# EAGLE board PCB (EAGLE 9.7.0)
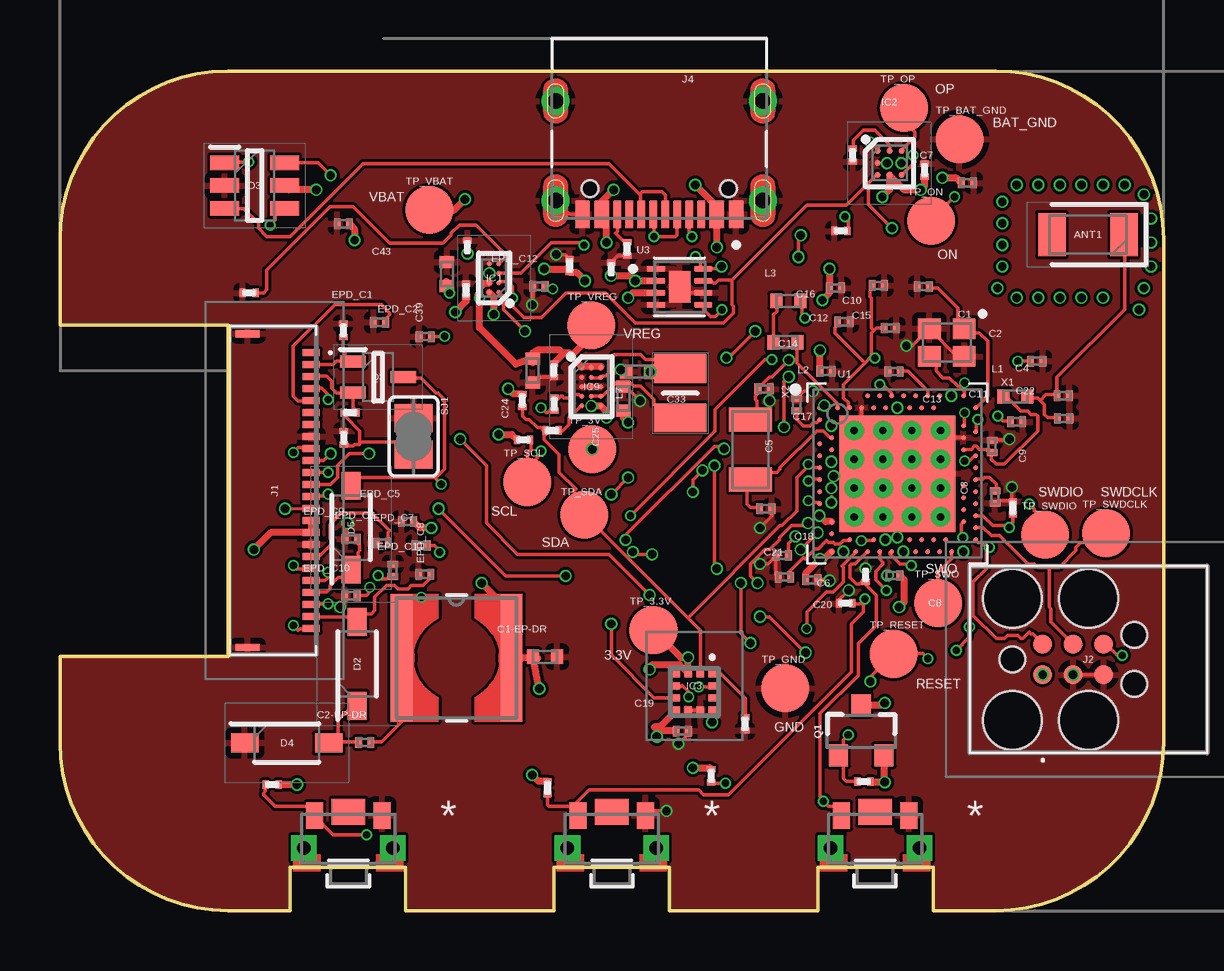
[diagram p0: board, top side]
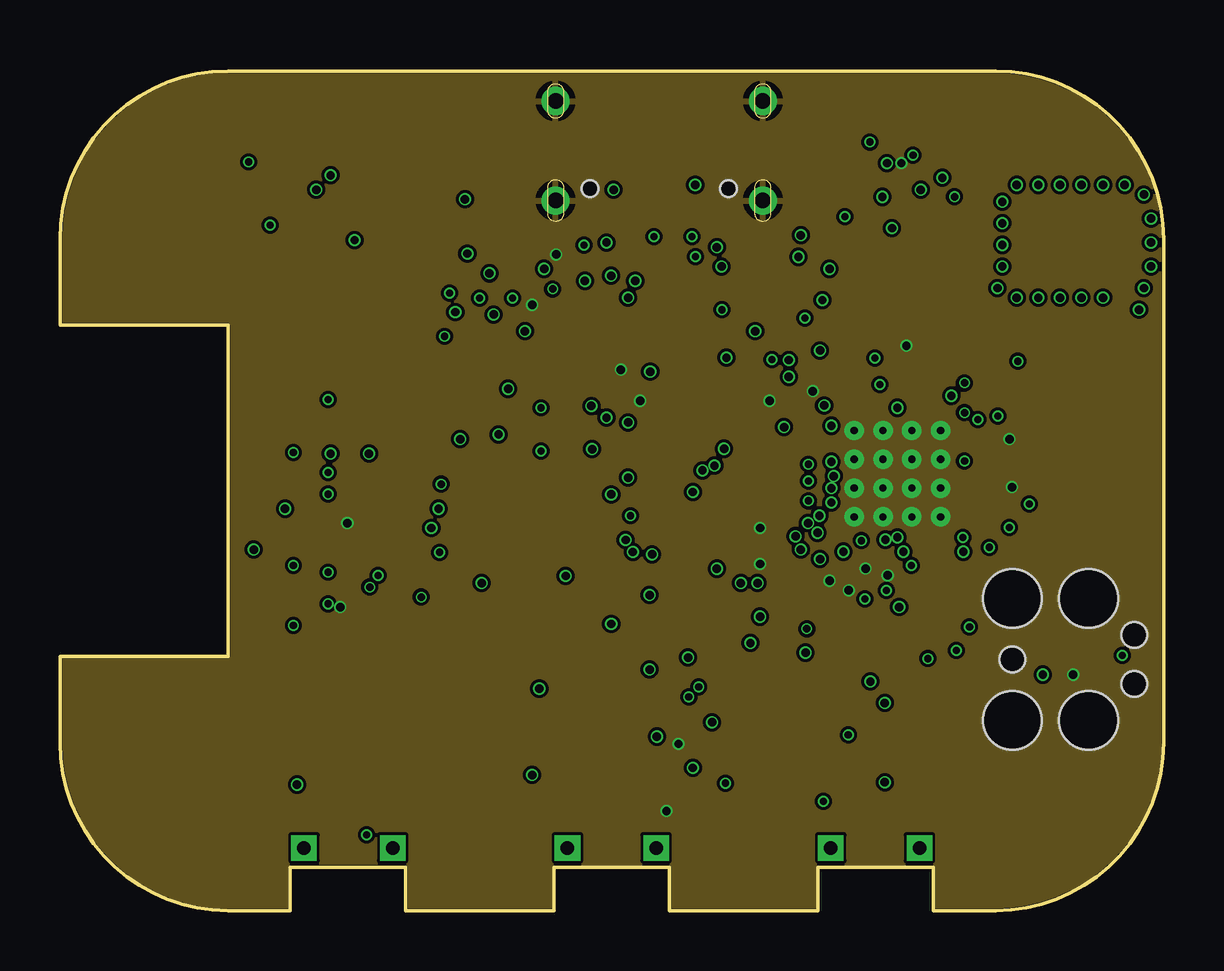
[diagram p1: board, inner layer Route2]
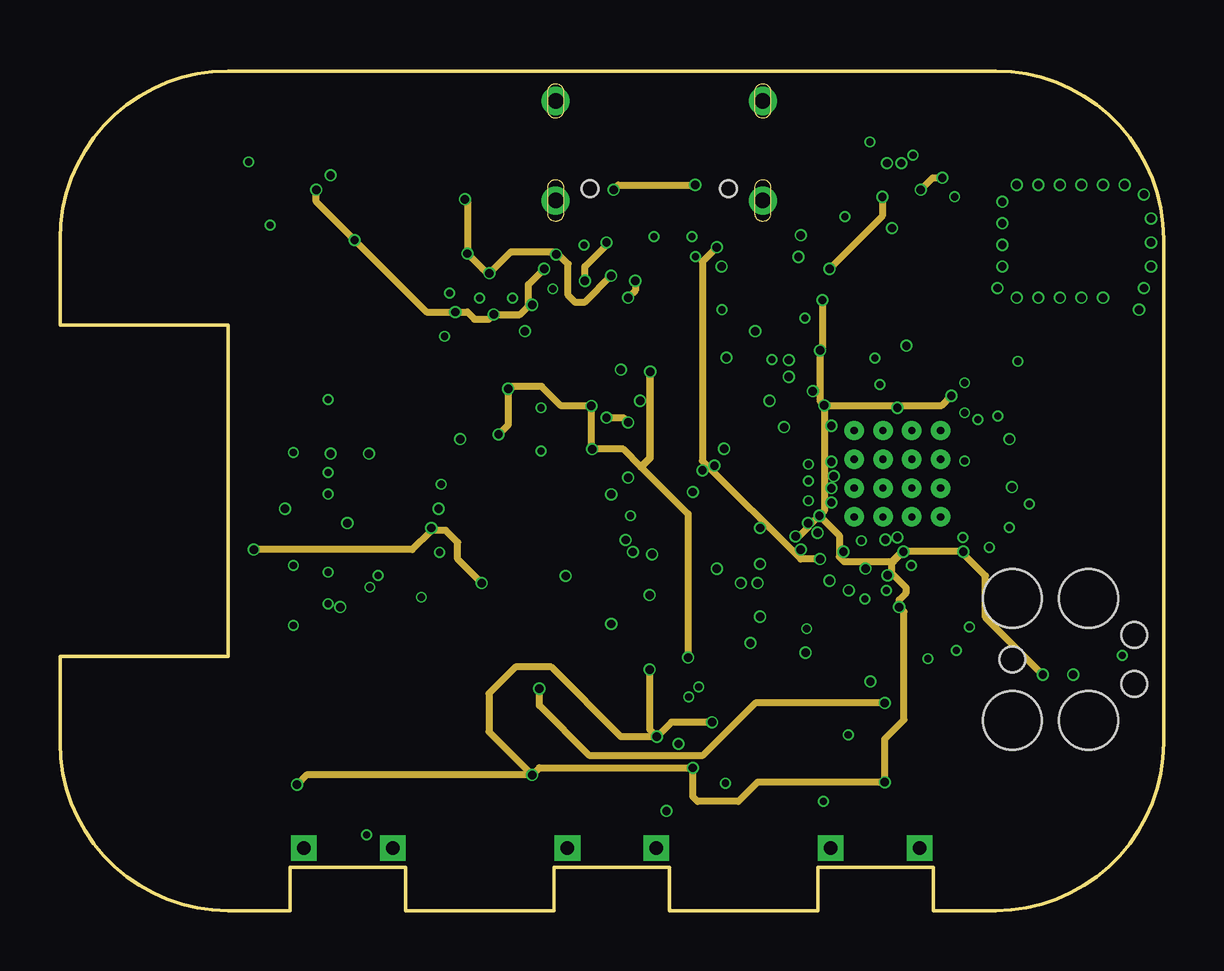
[diagram p2: board, inner layer Route15]
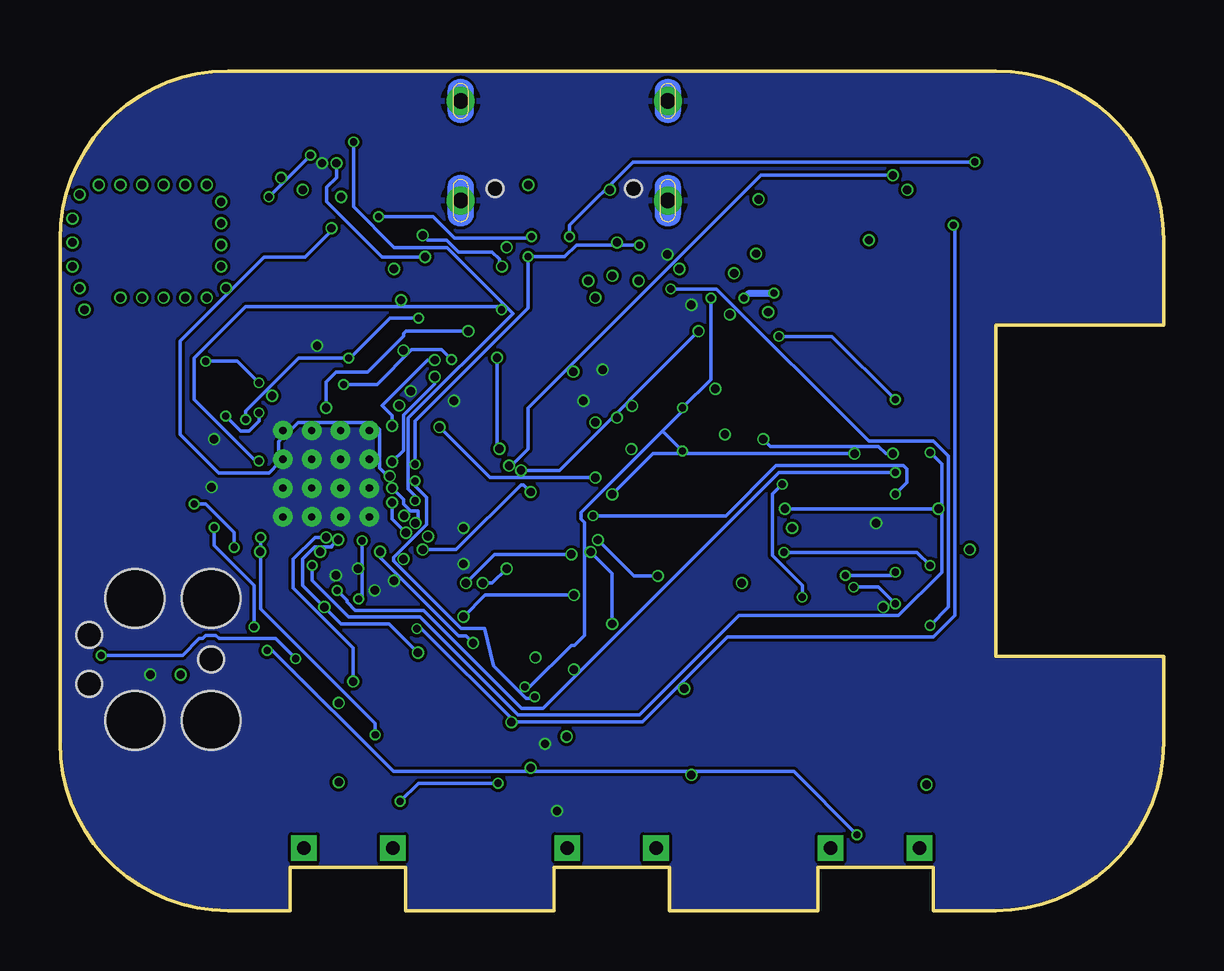
[diagram p3: board, bottom side, seen from below]

Size 46 x 35 mm. Coordinates in mm from the lower left corner, seen from the top.
Outline: 39,0 36.4,0 36.4,1.8 31.6,1.8 31.6,0 25.4,0 25.4,1.8 20.6,1.8 20.6,0 14.4,0 14.4,1.8 9.6,1.8 9.6,0 7,0 arc-90 0,7 0,10.6 7,10.6 7,24.4 0,24.4 0,28 arc-90 7,35 39,35 arc-90 46,28 46,7 arc-90 39,0
Copper layers (1+2*15+16): Top 0.035mm / dielectric 1.6mm / Route2 0.035mm / dielectric 0.15mm / Route15 0.035mm / dielectric 0.2mm / Bottom 0.035mm
Design rules "jlcpcb-2layers.dru *": minimum track width 0.15mm, minimum drill 0.3mm, track to track 5mil, track to pad 0.00126875mm, pad to pad 5mil, via to via 5mil, smd to smd 5mil, copper to edge 0.002mm, drill to drill 6mil, minimum pad ring 10mil, minimum via ring 3mil, stop-mask expansion 4mil, vias tented up to drill 0mil, thermal gap 10mil
Net classes: 1 Power: width 0.3 mm

## Footprints (pad centres in the part's own frame; a part is rotated, then mirrored left to right if it is on the bottom)
2450AT18B100E_ANTC3216X140N = smd 1.15 x 1.8: 1 -1.5,0; 2 1.5,0
NORDIC_NRF_3_RESC0201_L = smd 0.28 x 0.43: 1 -0.255,0; 2 0.255,0
NORDIC_NRF_3_RESC0402_L = smd 0.5 x 0.6: 1 -0.5,0; 2 0.5,0
GRM011R60J152KE01L_1_0201 = smd 0.35 x 0.25: 1 0,0.275; 2 0,-0.275
ESP32_C6_LIBRARY_5_SOD3716X135N = smd 1.15 x 0.8: 1 -1.75,0; 2 1.75,0
ESP32_C6_LIBRARY_3_SOT95P280X145-6N = smd 1.2 x 0.6: 1 -1.25,0.95; 2 -1.25,0; 3 -1.25,-0.95; 4 1.25,-0.95; 5 1.25,0; 6 1.25,0.95
BQ25180YBGR_BGA8C40P2X4_100X155X50 = smd 0.2 x 0.2: A1 -0.2,0.6; A2 0.2,0.6; B1 -0.2,0.2; B2 0.2,0.2; C1 -0.2,-0.2; C2 0.2,-0.2; D1 -0.2,-0.6; D2 0.2,-0.6
DRV2605YZFR_BGA9C50P3X3_144X144X62 = smd 0.25 x 0.25: A1 -0.5,0.5; A2 0,0.5; A3 0.5,0.5; B1 -0.5,0; B2 0,0; B3 0.5,0; C1 -0.5,-0.5; C2 0,-0.5; C3 0.5,-0.5
BMA423_BMA423 = smd 0.3 x 0.35: 1 -0.75,-0.775; 2 -0.25,-0.775; 3 0.25,-0.775; 4 0.75,-0.775; 7 0.75,0.775; 8 0.25,0.775; 9 -0.25,0.775; 10 -0.75,0.775 | smd 0.35 x 0.3: 5 0.775,-0.25; 6 0.775,0.25; 11 -0.775,0.25; 12 -0.775,-0.25
RT6160AWSC_BGA15C40P3X5_140X230X60 = smd 0.216 x 0.216: A1 -0.4,0.8; A2 0,0.8; A3 0.4,0.8; B1 -0.4,0.4; B2 0,0.4; B3 0.4,0.4; C1 -0.4,0; C2 0,0; C3 0.4,0; D1 -0.4,-0.4; D2 0,-0.4; D3 0.4,-0.4; E1 -0.4,-0.8; E2 0,-0.8; E3 0.4,-0.8
503480-2400_5034802400 = smd 0.3 x 0.7: 1 -5.75,1.525; 2 -5.25,1.525; 3 -4.75,1.525; 4 -4.25,1.525; 5 -3.75,1.525; 6 -3.25,1.525; 7 -2.75,1.525; 8 -2.25,1.525; 9 -1.75,1.525; 10 -1.25,1.525; 11 -0.75,1.525; 12 -0.25,1.525; 13 0.25,1.525; 14 0.75,1.525; 15 1.25,1.525; 16 1.75,1.525; 17 2.25,1.525; 18 2.75,1.525; 19 3.25,1.525; 20 3.75,1.525; 21 4.25,1.525; 22 4.75,1.525; 23 5.25,1.525; 24 5.75,1.525 | smd 0.3 x 1: MP1 -6.54,-1.125; MP2 6.54,-1.125
TC2030-IDC_TC2030IDC = smd 0.783 x 0.783: 1 -0.953,-0.635; 2 -0.953,0.635; 3 0.317,-0.635; 4 0.317,0.635; 5 1.588,-0.635; 6 1.588,0.635 | hole 2.451: -2.223,-2.54; -2.223,2.54; 0.952,-2.54; 0.952,2.54 | hole 1.067: -2.223,0; 2.857,-1.016; 2.857,1.016
KH-TYPE-C-16P_KINGHELM_KH-TYPE-C-16P = smd 0.6 x 1.15: A1_B12 -3.2,4.725; A4_B9 -2.4,4.725; A9_B4 2.4,4.725; A12_B1 3.2,4.725 | smd 0.3 x 1.15: A5 -1.25,4.725; A6 -0.25,4.725; A7 0.25,4.725; A8 1.25,4.725; B5 1.75,4.725; B6 0.75,4.725; B7 -0.75,4.725; B8 -1.75,4.725 | drill 0.65 pad 1.05: SH1 -4.32,0; SH2 4.32,0; SH3 -4.32,4.15; SH4 4.32,4.15 | hole 0.7: -2.89,3.65; 2.89,3.65
NORDIC_NRF_2_RESC0402_L = smd 0.5 x 0.6: 1 -0.5,0; 2 0.5,0
ESP32_C6_LIBRARY_2_IND_4828-WE-TPC_WRE = smd 0.9 x 5.3: 1 -2.286,0; 2 2.286,0
MLP2016SR47MT0S1_INDC2016X100N = smd 1.2 x 2.2: 1 -1.028,0; 2 1.028,0
ESP32_C6_LIBRARY_4_ESP32_C6_LIBRARY_4_ESP32_C6_LIBRARY_4_ESP32_C6_LIBRARY_4_ESP32_WROVER_SPARKFUN-DISCRETESEMI_SOT23-3 = smd 0.8 x 0.9: 1 -0.95,-1; 2 0.95,-1; 3 0,1.1
ESP32_C6_LIBRARY_6_SOT65P210X110-3N = smd 1.05 x 0.5: 1 -1.05,0.65; 2 -1.05,-0.65; 3 1.05,0
CPF0201D7K68C1_0201 = smd 0.35 x 0.25: 1 0,0.275; 2 0,-0.275
ESP32_C6_LIBRARY_7_JUMPER_SJ = smd 1.168 x 1.6: 1 -0.762,0; 2 0.762,0
2025-10-22_07-23-44_LIBRARY_SW_EVP-AKE31A_PAN = smd 0.711 x 1.092: 1 -1.4,-0.972; 2 1.4,-0.972 | drill 0.559 pad 0.914 square: 3 -1.848,0.381; 4 1.848,0.381 | smd 1.397 x 1.092: 5 0,-1.124
HECTOR_WATCH_1_TP20R = smd 2 x 2: TP 0,0
NORDIC_NRF_4_AQFN50P700X700X85_HS-74N = smd 4.85 x 4.85: P$74 0,0 | drill 0.3 pad 0.6: P$75 -1.8,1.8; P$76 -0.6,1.8; P$77 0.6,1.8; P$78 1.8,1.8; P$79 -1.8,0.6; P$80 -0.6,0.6; P$81 0.6,0.6; P$82 1.8,0.6; P$83 -1.8,-0.6; P$84 -0.6,-0.6; P$85 0.6,-0.6; P$86 1.8,-0.6; P$87 -1.8,-1.8; P$88 -0.6,-1.8; P$89 0.6,-1.8; P$90 1.8,-1.8 | smd 0.2 x 0.2: P$A8 -1.25,3.25; P$A10 -0.75,3.25; P$A12 -0.25,3.25; P$A14 0.25,3.25; P$A16 0.75,3.25; P$A18 1.25,3.25; P$A20 1.75,3.25; P$A22 2.25,3.25; P$A23 2.75,3.25; P$AA24 3.25,-2.25; P$AB2 -2.75,-2.5; P$AC5 -2,-2.75; P$AC9 -1,-2.75; P$AC11 -0.5,-2.75; P$AC13 0,-2.75; P$AC15 0.5,-2.75; P$AC17 1,-2.75; P$AC19 1.5,-2.75; P$AC21 2,-2.75; P$AC24 3.25,-2.75; P$AD2 -2.75,-3.25; P$AD4 -2.25,-3.25; P$AD6 -1.75,-3.25; P$AD8 -1.25,-3.25; P$AD10 -0.75,-3.25; P$AD12 -0.25,-3.25; P$AD14 0.25,-3.25; P$AD16 0.75,-3.25; P$AD18 1.25,-3.25; P$AD20 1.75,-3.25; P$AD22 2.25,-3.25; P$AD23 2.75,-3.25; P$B1 -3.25,2.75; P$B3 -2.5,2.75; P$B5 -2,2.75; P$B7 -1.5,2.75; P$B9 -1,2.75; P$B11 -0.5,2.75; P$B13 0,2.75; P$B15 0.5,2.75; P$B17 1,2.75; P$B19 1.5,2.75; P$B24 3.25,2.75; P$C1 -3.25,2.25; P$D2 -2.75,2; P$D23 2.75,2; P$E24 3.25,1.75; P$F2 -2.75,1.5; P$F23 2.75,1.5; P$G1 -3.25,1.25; P$H2 -2.75,1; P$H23 2.75,1; P$J1 -3.25,0.75; P$J24 3.25,0.75; P$K2 -2.75,0.5; P$L1 -3.25,0.25; P$L24 3.25,0.25; P$M2 -2.75,0; P$N1 -3.25,-0.25; P$N24 3.25,-0.25; P$P2 -2.75,-0.5; P$P23 2.75,-0.5; P$R1 -3.25,-0.75; P$R24 3.25,-0.75; P$T2 -2.75,-1; P$T23 2.75,-1; P$U1 -3.25,-1.25; P$U24 3.25,-1.25; P$V23 2.75,-1.5; P$W1 -3.25,-1.75; P$W24 3.25,-1.75; P$Y2 -2.75,-2; P$Y23 2.75,-2
ESP32_C6_LIBRARY_SON50P200X200X80-9N = smd 0.76 x 0.27: 1 -0.985,0.75; 2 -0.985,0.25; 3 -0.985,-0.25; 4 -0.985,-0.75; 5 0.985,-0.75; 6 0.985,-0.25; 7 0.985,0.25; 8 0.985,0.75 | smd 0.9 x 1.3: 9 0,0
NORDIC_NRF_BT-XTAL_2016_N = smd 0.95 x 0.85: 1 -0.725,-0.575; 2 0.725,-0.575; 3 0.725,0.575; 4 -0.725,0.575
NORDIC_NRF_1_XTAL_3215_N = smd 1 x 1.8: 1 -1.25,0; 2 1.25,0

## Placement (x,y rotation side)
ANT1  2450AT18B100E  [2450AT18B100E_ANTC3216X140N]  42.85,28.18 180 top
C1  12pF  [NORDIC_NRF_3_RESC0201_L]  35.99,26.01 180 top
C1-EP-DR  10uF  [NORDIC_NRF_3_RESC0402_L]  20.22,10.58 0 top
C2  12pF  [NORDIC_NRF_3_RESC0201_L]  40.71,22.9 0 top
C2-EP-DR  4.7uF/25V  [NORDIC_NRF_3_RESC0201_L]  12.71,7.01 0 top
C3  1pF  [NORDIC_NRF_3_RESC0201_L]  38.85,19.35 90 top
C4  1pF  [NORDIC_NRF_3_RESC0201_L]  41.82,21.46 0 top
C5  100nF  [NORDIC_NRF_3_RESC0201_L]  30.71,21.09 90 top
C6  4.7µF  [NORDIC_NRF_3_RESC0201_L]  30.11,14.8 180 top
C7  100nF  [NORDIC_NRF_3_RESC0201_L]  37.83,30.33 0 top
C8  100nF  [NORDIC_NRF_3_RESC0201_L]  34.75,13.97 180 top
C9  820pF N.C.  [NORDIC_NRF_3_RESC0201_L]  38.97,17.24 270 top
C10  N.C.  [NORDIC_NRF_3_RESC0201_L]  34.6,24.28 0 top
C11  100pF  [NORDIC_NRF_3_RESC0201_L]  39.88,20.37 0 top
C12  100nF  [NORDIC_NRF_3_RESC0201_L]  32.32,25.95 0 top
C13  N.C.  [NORDIC_NRF_3_RESC0201_L]  34.76,22.47 180 top
C14  4.7µF  [NORDIC_NRF_3_RESC0201_L]  31.94,22.48 0 top
C15  1.0µF  [NORDIC_NRF_3_RESC0201_L]  34.11,26.06 0 top
C16  47nF  [NORDIC_NRF_3_RESC0201_L]  32.68,24.54 0 top
C17  12pF  [NORDIC_NRF_3_RESC0201_L]  29.35,21.75 180 top
C18  12pF  [NORDIC_NRF_3_RESC0201_L]  29.42,16.75 180 top
C19  100nF  [NORDIC_NRF_3_RESC0201_L]  25.95,7.49 0 top
C20  4.7µF  [NORDIC_NRF_3_RESC0201_L]  30.2,13.9 180 top
C21  4.7µF  [NORDIC_NRF_3_RESC0201_L]  31.33,13.79 0 top
C22  N.C.  [NORDIC_NRF_3_RESC0201_L]  41.84,20.51 0 top
C23  0.1uF  [GRM011R60J152KE01L_1_0201]  20.58,22.52 180 top
C24  10uF  [NORDIC_NRF_3_RESC0402_L]  19.71,22.52 90 top
C25  22uF  [NORDIC_NRF_3_RESC0402_L]  23.48,21.35 90 top
C27  0.1uF  [GRM011R60J152KE01L_1_0201]  22.97,26.74 0 top
C29  1uF  [GRM011R60J152KE01L_1_0201]  39.72,16.78 0 top
C30  1uF  [GRM011R60J152KE01L_1_0201]  33.58,13.98 0 top
C31  1uF  [GRM011R60J152KE01L_1_0201]  32.75,12.81 90 top
C32  1uF  [GRM011R60J152KE01L_1_0201]  33.04,31.49 180 top
C33  22uF  [NORDIC_NRF_3_RESC0402_L]  24.1,22.47 180 top
C34  0.1uF  [GRM011R60J152KE01L_1_0201]  36.04,30.86 0 top
C37  1uF  [GRM011R60J152KE01L_1_0201]  16.98,27.66 0 top
C38  1uF  [GRM011R60J152KE01L_1_0201]  16.93,25.87 0 top
C39  10uF  [NORDIC_NRF_3_RESC0402_L]  16.13,26.54 90 top
C42  0.1uF  [GRM011R60J152KE01L_1_0201]  21.24,26.88 0 top
C43  4.7uF  [NORDIC_NRF_3_RESC0201_L]  11.81,28.63 180 top
D2  MBR0530  [ESP32_C6_LIBRARY_5_SOD3716X135N]  12.39,10.28 90 top
D3  USBLC6-2SC6Y  [ESP32_C6_LIBRARY_3_SOT95P280X145-6N]  8.12,30.22 0 top
D4  MBR0530  [ESP32_C6_LIBRARY_5_SOD3716X135N]  9.46,6.99 0 top
D5  MBR0530  [ESP32_C6_LIBRARY_5_SOD3716X135N]  12.14,15.96 90 top
EPD_C1  1uF/50V  [NORDIC_NRF_3_RESC0201_L]  13.32,24.52 0 top
EPD_C2  1uF/50V  [NORDIC_NRF_3_RESC0201_L]  15.23,23.92 0 top
EPD_C5  0.1uF/50V  [NORDIC_NRF_3_RESC0201_L]  14.49,16.22 0 top
EPD_C6  1uF/50V  [NORDIC_NRF_3_RESC0201_L]  13.44,15.32 0 top
EPD_C7  1uF/50V  [NORDIC_NRF_3_RESC0201_L]  15.05,15.22 0 top
EPD_C8  1uF/50V  [NORDIC_NRF_3_RESC0201_L]  13.88,14.18 270 top
EPD_C9  1uF/50V  [NORDIC_NRF_3_RESC0201_L]  12.14,15.49 0 top
EPD_C10  1uF/50V  [NORDIC_NRF_3_RESC0201_L]  12.13,13.12 0 top
EPD_C11  1uF/50V  [NORDIC_NRF_3_RESC0201_L]  15.21,14.02 0 top
EPD_C12  1uF/50V  [NORDIC_NRF_3_RESC0201_L]  19.97,26.02 0 top
IC1  BQ25180YBGR  [BQ25180YBGR_BGA8C40P2X4_100X155X50]  18.1,26.37 180 top
IC2  DRV2605YZFR  [DRV2605YZFR_BGA9C50P3X3_144X144X62]  34.57,31.16 0 top
IC3  BMA421  [BMA423_BMA423]  26.44,9.11 180 top
IC9  RT6160AWSC  [RT6160AWSC_BGA15C40P3X5_140X230X60]  22.15,21.84 0 top
J1  503480-2400  [503480-2400_5034802400]  8.95,17.51 270 top
J2  TC2030-IDC  [TC2030-IDC_TC2030IDC]  41.92,10.47 0 top
J4  KH-TYPE-C-16P_KH-TYPE-C-16P  [KH-TYPE-C-16P_KINGHELM_KH-TYPE-C-16P]  24.98,33.75 180 top
L1  3.9nH  [NORDIC_NRF_2_RESC0402_L]  39.82,21.43 0 top
L2  10µH  [NORDIC_NRF_2_RESC0402_L]  30.23,23.69 180 top
L3  15nH  [NORDIC_NRF_2_RESC0402_L]  30.36,25.42 0 top
L5  ESP32_C6_LIBRARY_2_744043680IND_4828-WE-TPC_WRE  [ESP32_C6_LIBRARY_2_IND_4828-WE-TPC_WRE]  16.53,10.53 0 top
L7  FTC252012SR47MBCA  [MLP2016SR47MT0S1_INDC2016X100N]  25.85,21.57 270 top
Q1  DMG2305UX-7  [ESP32_C6_LIBRARY_4_ESP32_C6_LIBRARY_4_ESP32_C6_LIBRARY_4_ESP32_C6_LIBRARY_4_ESP32_WROVER_SPARKFUN-DISCRETESEMI_SOT23-3]  33.4,7.47 0 top
Q3  SI1308EDL-T1-GE3  [ESP32_C6_LIBRARY_6_SOT65P210X110-3N]  13.26,22.24 0 top
R1_EP_DR  0.47  [CPF0201D7K68C1_0201]  12.09,20.76 90 top
R1_USB  5K1  [CPF0201D7K68C1_0201]  32.55,28.33 90 top
R2  0  [CPF0201D7K68C1_0201]  20.51,20.01 90 top
R2_EP_DR  10K  [CPF0201D7K68C1_0201]  11.81,24.19 0 top
R2_USB  5K1  [CPF0201D7K68C1_0201]  23.64,27.58 0 top
R3  0  [CPF0201D7K68C1_0201]  28.55,7.78 180 top
R4  0  [CPF0201D7K68C1_0201]  20.6,21.12 180 top
R5  10K  [CPF0201D7K68C1_0201]  27.14,5.62 180 top
R7  10K  [CPF0201D7K68C1_0201]  8.85,5.25 90 top
R8  10K  [CPF0201D7K68C1_0201]  20.32,5.12 180 top
R9  10K  [CPF0201D7K68C1_0201]  7.88,25.75 90 top
R17  3K3  [CPF0201D7K68C1_0201]  19.32,19.63 90 top
R18  3K3  [CPF0201D7K68C1_0201]  19.27,21.26 0 top
R_PWR_EPD  10K  [CPF0201D7K68C1_0201]  33.51,5.37 90 top
R_TYPE_SEL  2.2  [CPF0201D7K68C1_0201]  11.83,19.71 0 top
SJ1  [ESP32_C6_LIBRARY_7_JUMPER_SJ]  14.74,19.76 270 top
SW_DN  2025-10-22_07-23-44_LIBRARY_EVP-AKE31ASW_EVP-AKE31A_PAN  [2025-10-22_07-23-44_LIBRARY_SW_EVP-AKE31A_PAN]  12.02,2.99 180 top
SW_ENT  2025-10-22_07-23-44_LIBRARY_EVP-AKE31ASW_EVP-AKE31A_PAN  [2025-10-22_07-23-44_LIBRARY_SW_EVP-AKE31A_PAN]  23,2.99 180 top
SW_UP  2025-10-22_07-23-44_LIBRARY_EVP-AKE31ASW_EVP-AKE31A_PAN  [2025-10-22_07-23-44_LIBRARY_SW_EVP-AKE31A_PAN]  33.98,2.99 180 top
TP_3.3V  HECTOR_WATCH_1_TPTP20R  [HECTOR_WATCH_1_TP20R]  24.74,11.69 0 top
TP_3V  HECTOR_WATCH_1_TPTP20R  [HECTOR_WATCH_1_TP20R]  22.18,19.23 0 top
TP_BAT_GND  HECTOR_WATCH_1_TPTP20R  [HECTOR_WATCH_1_TP20R]  37.49,32.15 0 top
TP_GND  HECTOR_WATCH_1_TPTP20R  [HECTOR_WATCH_1_TP20R]  30.23,9.26 0 top
TP_ON  HECTOR_WATCH_1_TPTP20R  [HECTOR_WATCH_1_TP20R]  36.32,28.75 0 top
TP_OP  HECTOR_WATCH_1_TPTP20R  [HECTOR_WATCH_1_TP20R]  35.19,33.46 0 top
TP_RESET  HECTOR_WATCH_1_TPTP20R  [HECTOR_WATCH_1_TP20R]  34.74,10.7 0 top
TP_SCL  HECTOR_WATCH_1_TPTP20R  [HECTOR_WATCH_1_TP20R]  19.48,17.86 0 top
TP_SDA  HECTOR_WATCH_1_TPTP20R  [HECTOR_WATCH_1_TP20R]  21.85,16.51 0 top
TP_SWDCLK  HECTOR_WATCH_1_TPTP20R  [HECTOR_WATCH_1_TP20R]  43.61,15.73 0 top
TP_SWDIO  HECTOR_WATCH_1_TPTP20R  [HECTOR_WATCH_1_TP20R]  41.07,15.66 0 top
TP_SWO  HECTOR_WATCH_1_TPTP20R  [HECTOR_WATCH_1_TP20R]  36.6,12.82 0 top
TP_VBAT  HECTOR_WATCH_1_TPTP20R  [HECTOR_WATCH_1_TP20R]  15.4,29.2 0 top
TP_VREG  HECTOR_WATCH_1_TPTP20R  [HECTOR_WATCH_1_TP20R]  22.15,24.39 0 top
U1  NRF52840_QF  [NORDIC_NRF_4_AQFN50P700X700X85_HS-74N]  34.91,18.21 0 top
U3  MAX17048G+T10  [ESP32_C6_LIBRARY_SON50P200X200X80-9N]  25.83,26 0 top
X1  32MHz  [NORDIC_NRF_BT-XTAL_2016_N]  36.96,23.68 180 top
X2  32.768kHz  [NORDIC_NRF_1_XTAL_3215_N]  28.79,19.21 270 top

## Library data of the parts
ANT1 = InkTime_v5; ARROW_PART_NUMBER: 2450AT18B100E; ARROW_PRICE-STOCK: https://www.arrow.com/en/products/2450at18b100e/johanson-dielectrics?utm_currency=USD&region=nac; DESCRIPTION: Antennas 2.45GHz ANTENNA; HEIGHT: 1.4mm; MANUFACTURER_NAME: JOHANSON TECHNOLOGY; MANUFACTURER_PART_NUMBER: 2450AT18B100E; MOUSER_PART_NUMBER: 609-2450AT18B100E; MOUSER_PRICE-STOCK: https://www.mouser.co.uk/ProductDetail/Johanson-Technology/2450AT18B100E?qs=yCnrNFeXz%252Bh5MFsFIXGZGA%3D%3D
C1 C1-EP-DR C2 C2-EP-DR C3-C25 C27 C29-C34 C37-C39 C42 C43 EPD_C1 EPD_C2 EPD_C5-EPD_C12 L1-L3 R1_EP_DR R1_USB R2 R2_EP_DR R2_USB R3-R5 R7-R9 R17 R18 R_PWR_EPD R_TYPE_SEL SJ1 TP_3.3V TP_3V TP_BAT_GND TP_GND TP_ON TP_OP TP_RESET TP_SCL TP_SDA TP_SWDCLK TP_SWDIO TP_SWO TP_VBAT TP_VREG U1 X1 X2 = InkTime_v5
D2 D4 D5 = InkTime_v5; AVAILABILITY: In Stock; CHECK_PRICES: https://www.snapeda.com/parts/MBR0530/Onsemi/view-part/?ref=eda; DESCRIPTION: Diode Schottky 30 V 500mA Surface Mount SOD-123; MF: ON Semiconductor; MP: MBR0530; PACKAGE: SOD-123-2 ON Semiconductor; PRICE: None; PURCHASE-URL: https://www.snapeda.com/api/url_track_click_mouser/?unipart_id=179458&manufacturer=ON Semiconductor&part_name=MBR0530&search_term=None; SNAPEDA_LINK: https://www.snapeda.com/parts/MBR0530/Onsemi/view-part/?ref=snap
D3 = InkTime_v5; AVAILABILITY: In Stock; CHECK_PRICES: https://www.snapeda.com/parts/USBLC6-2SC6Y/STMicroelectronics/view-part/?ref=eda; DESCRIPTION: 17V Clamp 5A (8/20µs) Ipp Tvs Diode Surface Mount SOT-23-6; MF: STMicroelectronics; MP: USBLC6-2SC6Y; PACKAGE: SOT-23-6 STMicroelectronics; PRICE: None; SNAPEDA_LINK: https://www.snapeda.com/parts/USBLC6-2SC6Y/STMicroelectronics/view-part/?ref=snap
IC1 = InkTime_v5; ARROW_PART_NUMBER: BQ25180YBGR; ARROW_PRICE-STOCK: https://www.arrow.com/en/products/bq25180ybgr/texas-instruments?utm_currency=USD&region=nac; DESCRIPTION: Charger IC Lithium Ion/Polymer, Lithium Iron Phosphate 8-DSBGA (1.6x1.1); HEIGHT: 0.5mm; MANUFACTURER_NAME: Texas Instruments; MANUFACTURER_PART_NUMBER: BQ25180YBGR; MOUSER_PART_NUMBER: 595-BQ25180YBGR; MOUSER_PRICE-STOCK: https://www.mouser.co.uk/ProductDetail/Texas-Instruments/BQ25180YBGR?qs=doiCPypUmgEWjAK%252BJAX6Tw%3D%3D
IC2 = InkTime_v5; ARROW_PART_NUMBER: DRV2605YZFR; ARROW_PRICE-STOCK: https://www.arrow.com/en/products/drv2605yzfr/texas-instruments?region=nac; DESCRIPTION: Haptic Driver for ERM/LRA with Built-In Library and Smart Loop Architecture; HEIGHT: 0.625mm; MANUFACTURER_NAME: Texas Instruments; MANUFACTURER_PART_NUMBER: DRV2605YZFR
IC3 = InkTime_v5; ARROW_PART_NUMBER: BMA423; ARROW_PRICE-STOCK: https://www.arrow.com/en/products/bma423/bosch; DESCRIPTION: Accelerometers Triaxial low-g 12bit Acceleration Sensor; HEIGHT: 1mm; MANUFACTURER_NAME: BOSCH; MANUFACTURER_PART_NUMBER: BMA423; MOUSER_PART_NUMBER: 262-BMA423; MOUSER_PRICE-STOCK: https://www.mouser.co.uk/ProductDetail/Bosch-Sensortec/BMA423?qs=HXFqYaX1Q2xC%252BSgeGoX3mg%3D%3D
IC9 = InkTime_v5; DESCRIPTION: Buck-Boost Regulator Positive Output Step-Up/Step-Down I2C DC-DC Controller IC 15-WL-CSP (BSC) (1.4x2.3); HEIGHT: 0.6mm; MANUFACTURER_NAME: RICHTEK; MANUFACTURER_PART_NUMBER: RT6160AWSC; MOUSER_PART_NUMBER: 835-RT6160AWSC; MOUSER_PRICE-STOCK: https://www.mouser.co.uk/ProductDetail/Richtek/RT6160AWSC?qs=amGC7iS6iy%2FLd9PSoixZXQ%3D%3D
J1 = InkTime_v5; DESCRIPTION: FFC & FPC Connectors 0.5mm FPC RA SMT Dual Contact 24Ckt; HEIGHT: 1.87mm; MANUFACTURER_NAME: Molex; MANUFACTURER_PART_NUMBER: 503480-2400; MOUSER_PART_NUMBER: 538-503480-2400; MOUSER_PRICE-STOCK: https://www.mouser.co.uk/ProductDetail/Molex/503480-2400?qs=OAhjpuo3Vu7efIoxFh9AOw%3D%3D
J2 = InkTime_v5; DESCRIPTION: CABLE ADAPTER 6 POS; HEIGHT: 19mm; MANUFACTURER_NAME: Tag Connect; MANUFACTURER_PART_NUMBER: TC2030-IDC
J4 = InkTime_v5; AVAILABILITY: Not in stock; CHECK_PRICES: https://www.snapeda.com/parts/KH-TYPE-C-16P/Kinghelm/view-part/?ref=eda; MF: kinghelm; MP: KH-TYPE-C-16P; PACKAGE: None; PRICE: None; SNAPEDA_LINK: https://www.snapeda.com/parts/KH-TYPE-C-16P/Kinghelm/view-part/?ref=snap
L5 = InkTime_v5; COPYRIGHT: Copyright (C) 2024 Ultra Librarian. All rights reserved.; MANUFACTURER_PART_NUMBER: 744043680; MFR_NAME: Wurth Electronics
L7 = InkTime_v5; DESCRIPTION: SMD / SMT Inductors (Coils), L=0.47?H, L x W x T :; HEIGHT: 1mm; JLCPCB: https://jlcpcb.com/partdetail/6763488-FTC252012SR47MBCA/C5832368; MANUFACTURER_NAME: TDK; MANUFACTURER_PART_NUMBER: FTC252012SR47MBCA
Q1 = InkTime_v5; PROD_ID: TRAN-14388
Q3 = InkTime_v5; AVAILABILITY: In Stock; CHECK_PRICES: https://www.snapeda.com/parts/SI1308EDL-T1-GE3/Vishay+Siliconix/view-part/?ref=eda; DESCRIPTION: Si1308EDL-T1-GE3 N-channel MOSFET Transistor, 1.5 A, 30 V, 3-Pin SC-70 | Siliconix / Vishay SI1308EDL-T1-GE3; MF: Vishay Siliconix; MP: SI1308EDL-T1-GE3; PACKAGE: SOT-323 Vishay Semiconductor; PRICE: None; PURCHASE-URL: https://www.snapeda.com/api/url_track_click_mouser/?unipart_id=274603&manufacturer=Vishay Siliconix&part_name=SI1308EDL-T1-GE3&search_term=None; SNAPEDA_LINK: https://www.snapeda.com/parts/SI1308EDL-T1-GE3/Vishay+Siliconix/view-part/?ref=snap
SW_DN SW_ENT SW_UP = InkTime_v5; COPYRIGHT: Copyright (C) 2025 Ultra Librarian. All rights reserved.; DIGI-KEY_PART_NUMBER_1: P123437TR-ND; DIGI-KEY_PART_NUMBER_2: P123437CT-ND; DIGI-KEY_PART_NUMBER_3: P123437DKR-ND; MANUFACTURER_NAME: Panasonic; MANUFACTURER_PART_NUMBER: EVP-AKE31A
U3 = InkTime_v5; AVAILABILITY: In Stock; CHECK_PRICES: https://www.snapeda.com/parts/MAX17048G+T10/Analog+Devices/view-part/?ref=eda; DESCRIPTION: 3µA 1-Cell/2-Cell Fuel Gauge with ModelGauge; MF: Analog Devices; MP: MAX17048G+T10; PACKAGE: TDFN-8 Maxim; PRICE: None; PURCHASE-URL: https://www.snapeda.com/api/url_track_click_mouser/?unipart_id=329239&manufacturer=Analog Devices&part_name=MAX17048G+T10&search_term=None; SNAPEDA_LINK: https://www.snapeda.com/parts/MAX17048G+T10/Analog+Devices/view-part/?ref=snap

## Nets
3V3 [Power]: C6.1 C7.1 C8.1 C12.1 C14.1 C19.1 C25.1 C33.1 C34.2 IC2.C2 IC3.3 IC3.7 IC3.10 IC9.E2 IC9.E3 J2.1 Q1.2 R5.2 R7.2 R8.2 R17.1 R18.1 R_PWR_EPD.2 TP_3.3V.TP TP_3V.TP U1.P$A22 U1.P$AD14 U1.P$AD23 U1.P$B1 U1.P$W1 U1.P$Y2
ALERT: U1.P$J24 U3.5
D+: D3.4 U1.P$AD6
D-: D3.6 U1.P$AD4
DEC3: C11.1 U1.P$D23
DEC4_6: C10.1 C15.1 C16.1 L3.2 U1.P$B5 U1.P$E24
DN: D3.1 J4.A7 J4.B7
DP: D3.3 J4.A6 J4.B6
EPD_3V3: C1-EP-DR.1 EPD_C5.2 J1.15 J1.16 L5.2 Q1.3
EPD_BUSY: J1.9 U1.P$AD12
EPD_CS: J1.12 U1.P$K2
EPD_DC: J1.11 U1.P$AD10
EPD_RST: J1.10 U1.P$AC11
GDR: J1.2 Q3.1 R2_EP_DR.2
GND: C1-EP-DR.2 C1.2 C2.2 C3.2 C4.2 C5.2 C6.2 C7.2 C8.2 C9.2 C10.2 C11.2 C12.2 C13.2 C14.2 C15.2 C16.2 C17.1 C18.1 C19.2 C20.2 C21.2 C22.2 C23.1 C24.1 C25.2 C27.1 C29.1 C30.1 C31.1 C32.1 C33.2 C34.1 C37.1 C38.1 C39.2 C42.1 C43.2 D3.2 D4.1 EPD_C1.1 EPD_C2.1 EPD_C5.1 EPD_C6.1 EPD_C7.1 EPD_C8.1 EPD_C9.1 EPD_C10.1 EPD_C11.1 EPD_C12.1 IC1.D2 IC2.B1 IC2.B3 IC3.8 IC3.9 IC9.B1 IC9.C1 IC9.C2 IC9.C3 J1.8 J1.17 J1.MP1 J1.MP2 J2.3 J2.5 J4.A1_B12 J4.A12_B1 J4.SH1 J4.SH2 J4.SH3 J4.SH4 R1_USB.1 R2_EP_DR.1 R2_USB.2 R3.1 R9.1 R_TYPE_SEL.1 SJ1.1 SW_DN.1 SW_ENT.1 SW_UP.1 TP_BAT_GND.TP TP_GND.TP U1.P$74 U1.P$75 U1.P$76 U1.P$77 U1.P$78 U1.P$79 U1.P$80 U1.P$81 U1.P$82 U1.P$83 U1.P$84 U1.P$85 U1.P$86 U1.P$87 U1.P$88 U1.P$89 U1.P$90 U1.P$B7 U1.P$F23 U3.1 U3.4 U3.6 U3.9 X1.2 X1.4
HAPTIC_EN: IC2.A1 U1.P$U1
IMU_INT1: IC3.5 U1.P$N1
IMU_INT2: IC3.6 U1.P$P2
LX1: IC9.B2 IC9.B3 L7.1
LX2: IC9.D2 IC9.D3 L7.2
MOSI: J1.14 U1.P$B13
N$1: IC1.D1 R9.2
N$2: IC9.D1 R4.2
N$3: IC9.E1 R2.2
N$4: L2.2 L3.1
N$8: L2.1 U1.P$B3
N$9: C13.1 U1.P$A18
N$10: C5.1 U1.P$C1
N$14: C20.1 U1.P$AC5
N$20: C9.1 U1.P$N24
N$21: C3.1 L1.1 U1.P$H23
N$22: ANT1.1 C4.1 C22.1 L1.2
N$25: C1.1 U1.P$B24 X1.1
N$26: C2.1 U1.P$A23 X1.3
N$35: IC3.1 R3.2
N$44: C2-EP-DR.2 D5.2 L5.1 Q3.3
N$45: C2-EP-DR.1 D2.1 D4.2
N$52: R1_EP_DR.1 R_TYPE_SEL.2 SJ1.2
N$58: EPD_C2.2 J1.4
N$59: EPD_C1.2 J1.5
N$66: EPD_C7.2 J1.19
N$68: EPD_C12.2 J1.24
N$69: EPD_C8.2 J1.20
N$72: EPD_C6.2 J1.18
N$73: EPD_C10.2 J1.22
N$76: J4.A5 R1_USB.2
N$79: J4.B5 R2_USB.1
N$94: C32.2 IC2.A2
OUT+: IC2.A3 TP_OP.TP
OUT-: IC2.C3 TP_ON.TP
P0.00: C17.2 U1.P$D2 X2.1
P0.01: C18.2 U1.P$F2 X2.2
P0.04: U1.P$J1
P0.09: U1.P$L24
P0.13: C30.2 R5.1 SW_UP.2 U1.P$AD8
P0.14: C31.2 R8.1 SW_ENT.2 U1.P$AC9
P0.19: U1.P$AC15
P0.20: U1.P$AD16
P0.21: U1.P$AC17
P0.22: U1.P$AD18
P0.23: U1.P$AC19
P0.24: U1.P$AD20
P0.25: U1.P$AC21
P0.26: U1.P$G1
P0.27: U1.P$H2
P0.28: U1.P$B11
P0.29: U1.P$A10
P0.30: U1.P$B9
P0.31: U1.P$A8
P1.01: Q1.1 R_PWR_EPD.1 U1.P$Y23
P1.02: C29.2 R7.1 SW_DN.2 U1.P$W24
P1.03: U1.P$V23
P1.04: U1.P$U24
P1.05: U1.P$T23
P1.06: U1.P$R24
P1.07: U1.P$P23
P1.09: U1.P$R1
P1.10: U1.P$A20
P1.11: U1.P$B19
P1.12: U1.P$B17
P1.13: U1.P$A16
P1.14: U1.P$B15
P1.15: U1.P$A14
PMIC_INT: IC1.A1 U1.P$T2
PREVGH: D5.1 EPD_C9.2 J1.21
PREVGL: D2.2 EPD_C11.2 J1.23
RESE: J1.3 Q3.2 R1_EP_DR.2
RESET: J2.6 TP_RESET.TP U1.P$AC13
SCK: J1.13 U1.P$A12
SCL: IC1.B1 IC2.C1 IC3.12 R4.1 R17.2 TP_SCL.TP U1.P$M2 U3.7
SDA: IC1.C1 IC2.B2 IC3.2 R2.1 R18.2 TP_SDA.TP U1.P$L1 U3.8
SWDCLK: J2.4 TP_SWDCLK.TP U1.P$AA24
SWDIO: J2.2 TP_SWDIO.TP U1.P$AC24
SWO: TP_SWO.TP U1.P$AD22
VBAT [Power]: C27.2 C37.2 IC1.C2 TP_VBAT.TP U3.2 U3.3
VBUS [Power]: C21.1 C38.2 C42.2 C43.1 D3.5 IC1.A2 J4.A4_B9 J4.A9_B4 U1.P$AD2
VREG [Power]: C23.2 C24.2 C39.1 IC1.B2 IC9.A1 IC9.A2 IC9.A3 TP_VREG.TP

## Tracks (layer width: path | path; a pad name or v marks a point on that pad's centre or on a via)
3V3  (via drill 0.35)
  Top 0.15: C6.1 30.36,15.3 v30.66,15.6
  Top 0.152: U1.P$B1 31.76,21.06 v31.86,21.06
  Top 0.3: R18.1 18.89,21.54 v18.68,21.75 | v18.28,19.85 18.83,19.85 R17.1 | v22.78,20.55 22.78,20.81 IC9.E3 IC9.E2 | v23.68,20.35 23.48,20.55 C25.1 | C34.2 36.04,30.21 v35.88,30.05 35.18,30.05 IC2.C2 34.57,30.04 v34.28,29.75 | v36.78,30.55 37.36,30.55 C7.1 | v31.78,25.45 32.07,25.74 C12.1 32.08,25.97 v32.08,26.75 | R8.2 19.94,5.39 v19.68,5.65 | v9.88,5.25 R7.2 | C19.1 24.94,7.49 24.88,7.55 | 24.88,7.55 24.78,7.65 25,7.65 IC3.7 | 24.88,7.55 v24.88,7.25 | v26.38,5.95 27.08,5.95 R5.2 | R_PWR_EPD.2 34.36,5.37 | 34.36,5.37 v34.38,5.35 | C8.1 35.18,13.8 35.18,12.85 v34.98,12.65 | U1.P$Y2 31.91,16.21 U1.P$W1 | Q1.2 34.35,5.38 34.36,5.37 | TP_3.3V.TP 25.88,10.55 v26.18,10.55 IC3.3 25.82,10.25 24.68,10.25 24.58,10.15 v24.58,10.05 | IC3.10 v27.19,7.86 v27.18,7.85 | C14.1 | C14.1 v31.68,23.35
  Route15 0.3: v18.28,19.85 18.68,20.25 v18.68,21.75 18.78,21.85 20.08,21.85 20.89,21.04 IC9.E2 22.15,19.26 TP_3V.TP 23.48,19.23 24.22,18.49 26.18,16.53 v26.18,10.55 | v22.78,20.55 23.48,20.55 v23.68,20.35 | v35.88,30.05 36.38,30.55 v36.78,30.55 | v31.78,25.45 31.78,23.45 v31.68,23.35 31.68,21.24 v31.86,21.06 | v34.28,29.75 34.28,28.95 v32.08,26.75 | v31.86,21.06 36.76,21.06 U1.P$A22 | v19.68,5.65 10.28,5.65 v9.88,5.25 | v24.88,7.25 23.38,7.25 20.48,10.15 18.98,10.15 17.88,9.05 17.88,7.45 v19.68,5.65 | v19.68,5.65 19.98,5.95 v26.38,5.95 26.38,4.75 26.58,4.55 28.28,4.55 29.08,5.35 v34.38,5.35 34.38,7.15 35.18,7.95 35.18,12.45 v34.98,12.65 34.98,12.95 35.28,13.25 35.28,13.45 34.68,14.05 34.68,14.55 35.09,14.96 U1.P$AD14 | U1.P$W1 30.8,15.6 v30.66,15.6 | U1.P$W1 32.48,15.64 32.48,14.75 32.68,14.55 34.75,14.55 U1.P$AD14 | J2.1 38.58,12.22 38.58,13.95 37.66,14.87 U1.P$AD23 U1.P$AD14 | v24.58,10.05 24.58,7.55 v24.88,7.25 | v27.18,7.85 25.48,7.85 v24.88,7.25 | v31.86,21.06 31.86,16.66 U1.P$W1
  Route15 0.305: C33.1 24.6,19.85 24.6,18.87 24.22,18.49
  other vias: 37.16,21.46 35.16,14.96 31.66,16.46 22.15,21.04 40.97,9.83 37.66,14.96 22.18,19.23 24.6,22.47
ALERT  (via drill 0.3)
  Top 0.15: v37.71,18.74 37.91,18.74 38.12,18.95 U1.P$J24 | v27.6,25.05 27.32,24.77 27.11,24.77 26.83,25.05 26.83,25.18 U3.5
  Bottom 0.15: v37.71,18.74 37.84,18.74 40.41,21.31 40.41,23.04 38.26,25.18 27.73,25.18 v27.6,25.05
D+  (via drill 0.3)
  Top 0.15: U1.P$AD6 33.16,14.93 32.6,14.37 32.65,14.31 32.65,13.69 32.24,13.27 31.96,13.27 31.13,12.44 v31.13,11.75 | v8.76,28.58 8.97,28.78 8.97,28.99 9.31,29.34 D3.4
  Bottom 0.15: v31.13,11.75 30.92,11.75 27.04,7.87 21.71,7.87 18.18,11.4 9.59,11.4 8.69,12.3 8.69,28.51 v8.76,28.58
D-  (via drill 0.35)
  Top 0.15: D3.6 10.76,31.17 v11.28,30.65 | v27.28,18.55 27.28,14.35 v27.38,14.25 | v28.38,13.65 28.38,11.55 v28.78,11.15
  Bottom 0.15: v11.28,30.65 16.78,30.65 26.48,20.95 26.48,19.25 27.18,18.55 v27.28,18.55 | v27.38,14.25 27.98,13.65 v28.38,13.65 | v28.78,11.15 29.08,11.45 29.38,11.45 32.66,14.73 U1.P$AD4
  other vias: 32.66,14.96
DEC3  (via drill 0.3)
  Top 0.15: v37.71,20.75 37.77,20.68 37.77,20.61 37.71,20.54 37.71,20.27 U1.P$D23 | v39.09,20.61 39.3,20.41 39.51,20.41 39.57,20.48 39.64,20.41 C11.1
  Bottom 0.15: v37.71,20.75 37.71,20.41 38.12,19.99 38.47,19.99 v39.09,20.61
DEC4_6  (via drill 0.3)
  Top 0.15: 33.83,23.11 33.55,22.83 | 33.55,22.83 32.65,21.93 32.65,21.38 32.86,21.17 32.86,20.96 U1.P$B5 | 33.83,23.11 33.83,24.08 33.93,24.18 | 33.93,24.18 34.04,24.28 34.24,24.28 34.31,24.35 34.38,24.28 C10.1 | v38.26,20.48 38.26,20.34 38.19,20.27 38.19,19.99 U1.P$E24 | v33.97,23.04 33.9,23.11 33.83,23.11 | 33.55,22.83 32.3,24.08 32.3,24.28 32.37,24.35 32.37,24.49 C16.1 | 33.93,24.18 33.83,24.28 33.83,25.53 33.76,25.6 33.76,25.81 33.83,25.88 33.83,26.02 C15.1 | v31.06,24.7 31.06,24.77 30.92,24.91 30.92,25.39 L3.2
  Bottom 0.15: v38.26,20.48 38.26,20.82 36.04,23.04 v33.97,23.04 33.9,23.04 32.24,24.7 v31.06,24.7
DN  (via drill 0.3)
  Top 0.15: 24.76,28.16 24.76,28.99 J4.A7 | 24.76,28.16 24.82,28.09 25.66,28.09 25.73,28.16 25.73,28.99 J4.B7 | v7.86,31.21 6.89,31.21 D3.1 | v24.76,28.09 24.76,28.16
  Bottom 0.15: v7.86,31.21 22.12,31.21 24.76,28.58 v24.76,28.09
DP
  Top 0.15: 24.2,29.89 24.2,29.06 J4.B6 | 24.2,29.89 24.27,29.96 25.1,29.96 25.24,29.82 25.24,29.06 J4.A6 | D3.3 6.89,29.27 7.65,29.27 8.27,28.65 8.27,28.44 8.62,28.09 9.59,28.09 12.64,31.14 22.89,31.14 24.13,29.89 24.2,29.89
EPD_3V3  (via drill 0.35)
  Top 0.3: v15.48,15.95 15.02,15.95 EPD_C5.2 | v8.08,15.05 8.79,15.76 J1.16 J1.15 | Q1.3 34.3,8.57 v34.38,8.65 | v19.98,9.25 19.97,9.26 C1-EP-DR.1 19.92,10.53 L5.2 18.81,12.42 v17.58,13.65
  Route15 0.3: v8.08,15.05 14.68,15.05 15.48,15.85 | 15.48,15.85 v15.48,15.95 | v34.38,8.65 28.98,8.65 26.78,6.45 22.08,6.45 19.98,8.55 v19.98,9.25 | v17.58,13.65 16.58,14.65 16.58,15.35 16.08,15.85 15.48,15.85
EPD_BUSY  (via drill 0.3)
  Top 0.15: v35.49,14.38 35.42,14.45 35.01,14.45 34.59,14.87 34.59,14.94 U1.P$AD12 | v9.73,19.09 9.94,19.3 10.07,19.3 10.14,19.23 10.42,19.23 J1.9
  Bottom 0.15: v35.49,14.38 35.49,13.76 33.97,12.23 30.99,12.23 26.9,8.15 21.85,8.15 17.69,12.3 11.04,12.3 9.24,14.1 9.24,18.6 v9.73,19.09
EPD_CS  (via drill 0.35)
  Top 0.15: J1.12 11.29,17.76 11.58,18.05 11.58,18.55 12.08,19.05 v12.88,19.05 | v22.98,17.35 v23.68,18.05 | v30.18,20.15 30.18,22.05 v30.38,22.25
  Bottom 0.15: v12.88,19.05 21.28,19.05 v22.98,17.35 | v23.68,18.05 28.08,18.05 v30.18,20.15 | v30.38,22.25 30.38,21.95 31.68,20.65 31.68,19.19 U1.P$K2
  other vias: 32.16,18.71
EPD_DC  (via drill 0.3)
  Top 0.15: v34.45,13.34 34,13.79 34,14.14 34.31,14.45 34.31,14.52 34.17,14.66 34.17,14.94 U1.P$AD10 | v11.18,18.26 10.49,18.26 J1.11
  Bottom 0.15: v34.45,13.34 34.04,12.93 34.04,12.86 33.69,12.51 30.85,12.51 26.76,8.43 25.86,8.43 16.03,18.26 v11.18,18.26
EPD_RST  (via drill 0.35)
  Top 0.15: J1.10 10.99,18.76 v11.28,19.05 | v16.68,19.65 17.78,18.55 17.78,16.15 19.08,14.85 22.88,14.85 v24.58,13.15 | v29.18,12.25 29.58,12.25 v31.08,10.75
  Bottom 0.15: v11.28,19.05 11.58,19.05 11.88,19.35 16.38,19.35 v16.68,19.65 | v24.58,13.15 28.28,13.15 v29.18,12.25 | v31.08,10.75 32.28,11.95 34.28,11.95 35.88,13.55 35.88,14.65 35.38,15.15 34.68,15.15 34.7,15.17 U1.P$AC11
  other vias: 34.41,15.46
GDR
  Top 0.15: R2_EP_DR.2 11.81,23.87 11.81,23.38 11.88,23.31 11.88,23.11 12.15,22.83 Q3.1 11.88,23.04 11.74,22.9 11.53,22.9 11.39,22.76 10.49,22.76 J1.2
GND  (via drill 0.35)
  Top 0.15: J2.5 J2.3 | SW_ENT.1 24.59,4.15 v25.28,4.15 | C19.2 26.2,7.37 v25.78,6.95 | EPD_C10.1 11.87,12.84 v11.68,12.65 | EPD_C9.1 11.88,16.05 v11.98,16.15 | C42.1 21.05,27.35 v20.68,27.35 | EPD_C12.1 19.71,25.28 v19.68,25.25 | v35.28,23.55 35.54,23.55 X1.2 37.39,23.1 X1.4 | C29.1 39.68,17.1 | 39.68,17.1 v39.68,17.65 | C9.2 39.09,17.1 39.68,17.1 | C18.1 29.68,16.45 v29.18,15.95 | v29.18,14.45 29.5,14.45 C6.2 29.85,13.99 C20.2 | J4.A12_B1 21.24,29.03 J4.SH4 | C3.2 39.54,19.6 v39.58,19.65 | U1.P$F23 37.01,19.71 U1.P$78 | C31.1 32.47,12.94 v32.88,13.35 | C21.2 32.04,13.79 v32.08,13.75 | U3.6 26.08,25.75 U3.9 | U1.P$B7 33.41,20.31 U1.P$75 | C25.2 23.82,21.61 v24.18,21.25 | C33.2 23.46,22.47 v23.38,22.55 | U1.P$74 U1.P$84 | C27.1 23.27,27.31 R2_USB.2 | IC3.8 IC3.9 | IC9.C1 IC9.C2 IC9.C3 | C5.2 31.02,21.65 v31.38,21.65 | C17.1 29.61,21.28 v29.58,21.25
  Top 0.152: C24.1 19.93,22.25 C23.1
  other vias: 42.24,9.83 33.58,14.26 34.5,13.97 35.07,31.16
  pour Top: 0.61,-2.27 47.55,-2.27 49.6,-0.22 49.6,35.22 46.45,38.37 -0.99,38.37 -1.04,38.32 -1.04,-0.62
  pour Route2: 0.61,-3.77 47.55,-3.77 50.5,-0.82 50.5,35.32 46.25,39.57 0.21,39.57 -2.14,37.22 -2.14,-1.02
  pour Bottom: 2.51,-7.27 45.95,-7.27 52.5,-0.72 52.5,34.22 46.15,40.57 -3.69,40.57 -3.74,40.52 -3.74,-1.02
HAPTIC_EN  (via drill 0.3)
  Top 0.15: v31.2,17.08 31.4,17.08 31.47,17.01 31.61,17.01 U1.P$U1 | v33.76,32.04 34.1,31.69 IC2.A1
  Bottom 0.15: v31.2,17.08 31.2,17.29 31.48,17.58 31.48,20.54 27.12,24.9 29.87,27.65 32.07,27.65 33.76,29.34 v33.76,32.04
IMU_INT1  (via drill 0.3)
  Top 0.15: v31.2,17.91 31.2,17.98 31.27,18.05 31.33,17.98 31.61,17.98 U1.P$N1 | v26.21,8.91 26.21,9.12 25.93,9.4 25.86,9.33 25.8,9.33 25.73,9.26 25.66,9.33 IC3.5
  Bottom 0.15: v31.2,17.91 31.2,17.7 30.71,17.22 30.71,16.1 32.1,14.71 32.1,14.57 29.28,11.75 28.31,11.75 27.93,10.2 26.56,8.84 26.28,8.84 v26.21,8.91
IMU_INT2  (via drill 0.35)
  Top 0.15: v31.18,16.15 31.08,16.05 30.48,16.05 29.98,15.55 29.98,15.45 29.58,15.05 29.38,15.05 28.78,14.45 28.78,13.95 v29.08,13.65 | v24.68,14.85 23.98,14.85 v23.88,14.95 | v22.98,11.95 22.98,10.65 24.77,8.86 IC3.6 | U1.P$P2 v32.16,17.61
  Bottom 0.15: v32.16,17.61 31.68,17.13 31.68,16.95 31.38,16.65 31.08,16.65 31.08,16.25 v31.18,16.15 | v29.08,13.65 27.88,14.85 v24.68,14.85 | v23.88,14.95 22.98,14.05 v22.98,11.95
LX1
  Top 0.15: IC9.B2 22.19,22.21 22.54,22.21 IC9.B3 22.61,22.28 22.75,22.28 22.89,22.42 22.89,22.96 22.89,22.97 23.09,23.18 24.2,23.18 24.41,22.97 25.24,22.97 25.46,22.75 L7.1
LX2
  Top 0.15: IC9.D2 22.19,21.44 IC9.D3 22.61,21.44 23.16,22 23.79,22 23.93,21.86 24.2,21.86 24.76,21.31 24.76,21.1 25.31,20.54 25.79,20.54 L7.2
MOSI  (via drill 0.35)
  Top 0.15: v28.98,24.15 27.88,23.05 v27.78,23.05 | v27.68,19.25 27.58,19.35 27.28,19.35 23.58,15.65 v23.58,15.45 | v21.08,13.95 18.58,13.95 v15.78,16.75 | J1.14 v9.38,16.75
  Bottom 0.15: U1.P$B13 34.91,22.02 34.48,22.45 33.18,22.45 31.68,23.95 31.68,24.05 31.58,24.15 v28.98,24.15 | v27.78,23.05 27.78,19.35 v27.68,19.25 | v23.58,15.45 22.08,13.95 v21.08,13.95 | v15.78,16.75 v9.38,16.75
  other vias: 34.91,20.96
N$1
  Top 0.15: IC1.D1 18.32,26.98 18.59,27.26 18.59,27.33 17.35,28.58 16.65,28.58 16.31,28.23 16.31,28.16 15.96,27.82 13.74,27.82 12.22,29.34 11.25,29.34 8.62,26.71 8.62,25.88 8.48,25.74 8.21,25.74 R9.2
N$2
  Top 0.15: IC9.D1 21.71,21.44 21.64,21.51 21.5,21.51 21.36,21.38 21.02,21.38 20.95,21.44 20.88,21.44 20.81,21.38 20.74,21.38 20.67,21.31 20.6,21.38 R4.2
N$3
  Top 0.15: IC9.E1 21.71,21.03 21.22,20.54 21.22,20.27 20.95,19.99 20.88,19.99 20.81,19.92 20.74,19.99 R2.2
N$4
  Top 0.15: L2.2 29.74,23.73 29.74,24.84 29.88,24.98 29.88,25.39 L3.1
N$6  (via drill 0.35)
  other vias: 39.88,30.25
N$7  (via drill 0.35)
  other vias: 40.78,30.25
N$8
  Top 0.15: U1.P$B3 32.41,21.13 30.71,22.82 30.71,23.66 L2.1
N$9
  Top 0.15: U1.P$A18 36.18,21.51 36.18,21.65 35.35,22.48 35.14,22.48 35.07,22.55 35.01,22.48 C13.1
N$10
  Top 0.15: U1.P$C1 31.61,20.41 31.54,20.34 31.4,20.34 31.27,20.2 30.99,20.2 30.71,20.48 30.71,20.75 30.78,20.82 30.71,20.89 C5.1
N$11  (via drill 0.35)
  other vias: 41.68,30.25
N$12  (via drill 0.35)
  other vias: 42.58,30.25
N$13  (via drill 0.35)
  other vias: 43.48,30.25
N$14
  Top 0.15: U1.P$AC5 32.86,15.42 32.65,15.42 32.51,15.28 32.3,15.28 32.24,15.35 32.03,15.35 31.96,15.42 31.61,15.07 31.47,15.07 31.06,14.66 30.99,14.73 30.34,14.08 C20.1
N$15  (via drill 0.35)
  other vias: 44.38,30.25
N$16  (via drill 0.35)
  other vias: 39.28,26.85
N$17  (via drill 0.35)
  other vias: 45.18,29.85
N$18  (via drill 0.35)
  other vias: 45.48,28.85
N$19  (via drill 0.35)
  other vias: 45.48,27.85
N$20
  Top 0.15: U1.P$N24 38.19,17.98 38.47,17.98 38.54,18.05 38.74,18.05 39.02,17.77 39.02,17.57 39.09,17.5 39.02,17.43 C9.1
N$21
  Top 0.15: U1.P$H23 37.71,19.23 37.98,19.23 38.12,19.37 38.19,19.37 38.33,19.23 38.74,19.23 38.81,19.16 C3.1 38.68,19.16 38.81,19.02 38.81,18.81 39.02,18.6 39.37,18.6 40.75,19.99 40.75,20.61 40.68,20.68 40.48,20.68 40.34,20.82 40.06,20.82 39.51,21.38 39.37,21.38 L1.1
N$22
  Top 0.15: 40.86,21.27 40.75,21.38 40.34,21.38 L1.2 | 40.86,21.27 41.03,21.1 41.03,20.68 41.17,20.54 41.58,20.54 C22.1 | 40.86,21.27 41.1,21.51 41.51,21.51 C4.1 41.56,22.23 44.38,25.05 44.38,28.15 ANT1.1
N$23  (via drill 0.35)
  other vias: 45.48,26.85
N$24  (via drill 0.35)
  other vias: 45.18,25.95
N$25
  Top 0.15: U1.P$B24 38.19,20.96 38.68,21.44 38.68,23.73 38.33,24.08 37.84,24.08 37.71,24.22 X1.1 37.64,24.28 37.43,24.49 37.43,25.11 36.6,25.95 36.25,25.95 C1.1
N$26  (via drill 0.3)
  Top 0.15: 37.53,21.83 37.5,21.86 37.43,21.86 37.08,22.21 36.8,22.21 36.53,22.48 36.53,22.76 36.25,23.04 X1.3 | 37.53,21.83 37.71,21.65 37.71,21.51 U1.P$A23 | v39.92,22.9 40.41,22.9 C2.1 | 37.53,21.83 v37.71,22
  Bottom 0.15: v39.92,22.9 38.61,22.9 v37.71,22
N$27  (via drill 0.35)
  other vias: 44.98,25.05
N$28  (via drill 0.35)
  other vias: 43.48,25.55
N$29  (via drill 0.35)
  other vias: 42.58,25.55
N$30  (via drill 0.35)
  other vias: 41.68,25.55
N$31  (via drill 0.35)
  other vias: 40.78,25.55
N$32  (via drill 0.35)
  other vias: 39.88,25.55
N$34  (via drill 0.35)
  other vias: 39.08,25.95
N$35
  Top 0.15: R3.2 28.56,8.08 28.56,8.84 27.53,9.88 27.32,9.88 27.25,9.81 IC3.1
N$36  (via drill 0.35)
  other vias: 39.28,27.75
N$37  (via drill 0.35)
  other vias: 39.28,28.65
N$39  (via drill 0.35)
  other vias: 39.28,29.55
N$44  (via drill 0.3)
  Top 0.15: C2-EP-DR.2 12.98,7.04 13.4,7.04 14.23,7.87 14.23,10.5 L5.1 14.3,10.57 14.3,12.3 v15.06,13.07 | 15.68,18.05 16.03,18.4 16.03,21.31 15.75,21.58 15.68,21.58 15.06,22.21 14.37,22.21 Q3.3 | 15.68,18.05 12.43,18.05 12.15,17.77 D5.2 | v15.89,17.77 15.68,17.98 15.68,18.05
  Bottom 0.15: v15.06,13.07 15.06,13.55 16.31,14.8 16.31,17.36 v15.89,17.77
N$45
  Top 0.15: C2-EP-DR.1 12.43,7.04 11.25,7.04 D4.2 11.6,7.11 11.6,7.94 12.15,8.49 12.36,8.49 D2.1
N$52
  Top 0.15: 12.5,19.54 14.2,19.54 14.71,19.02 SJ1.2 | R_TYPE_SEL.2 11.88,19.44 12.01,19.44 12.08,19.37 12.22,19.37 12.29,19.44 12.5,19.44 12.5,19.54 | 12.5,19.54 12.5,19.99 11.88,20.61 11.88,20.75 R1_EP_DR.1
N$58  (via drill 0.3)
  Top 0.15: v16.03,23.94 15.55,23.94 EPD_C2.2 | v11.18,21.31 11.18,21.51 10.91,21.79 10.49,21.79 J1.4
  Bottom 0.15: v16.03,23.94 13.81,23.94 v11.18,21.31
N$59
  Top 0.15: EPD_C1.2 13.61,24.56 13.61,24.7 13.74,24.84 13.74,24.91 13.4,25.25 11.46,25.25 9.73,23.52 9.73,21.44 9.94,21.24 10.42,21.24 J1.5
N$66  (via drill 0.3)
  Top 0.15: v15.82,14.94 15.82,15.01 15.62,15.21 15.34,15.21 EPD_C7.2 | v9.73,14.38 9.87,14.24 10.42,14.24 J1.19
  Bottom 0.15: v15.82,14.94 10.28,14.94 v9.73,14.38
N$68  (via drill 0.3)
  Top 0.15: v20.54,25.92 20.44,25.97 EPD_C12.2 | v9.73,11.89 9.94,11.68 10.01,11.75 10.42,11.75 J1.24
  Bottom 0.15: v20.54,25.92 18.63,25.92 12.29,19.58 9.59,19.58 8.97,18.95 8.97,12.65 v9.73,11.89
N$69  (via drill 0.3)
  Top 0.15: v13.26,13.97 13.4,13.83 13.61,13.83 13.68,13.9 13.81,13.9 EPD_C8.2 | v11.18,14.1 11.18,13.9 11.04,13.76 10.49,13.76 J1.20
  Bottom 0.15: v13.26,13.97 11.32,13.97 v11.18,14.1
N$72
  Top 0.15: EPD_C6.2 13.74,15.35 13.74,15.49 13.68,15.56 13.68,15.77 13.74,15.84 13,16.58 11.73,16.58 11.25,16.1 11.25,15.49 11.32,15.42 11.32,15.28 10.77,14.73 10.49,14.73 J1.18
N$73  (via drill 0.3)
  Top 0.15: v12.91,13.48 12.91,13.27 12.77,13.13 12.43,13.13 EPD_C10.2 | v11.18,12.79 10.49,12.79 J1.22
  Bottom 0.15: v12.91,13.48 11.88,13.48 v11.18,12.79
N$76  (via drill 0.3)
  Top 0.15: v32.72,28.92 32.86,28.78 32.86,28.37 R1_USB.2 | v26.35,28.09 26.21,28.23 26.21,28.99 J4.A5
  Bottom 0.15: v32.72,28.92 30.44,28.92 29.54,28.02 26.42,28.02 v26.35,28.09
N$79
  Top 0.15: R2_USB.1 23.58,27.89 23.51,27.89 23.16,28.23 23.23,28.3 23.23,28.99 J4.B5
N$94
  Top 0.15: IC2.A2 34.59,31.69 34.59,31.9 33.97,32.53 33.48,32.53 33.07,32.11 33.07,31.83 C32.2
OUT+
  Top 0.15: IC2.A3 35.14,31.69 35.14,31.76 35.63,32.25 35.63,32.46 35.21,32.87 35.21,33.42 TP_OP.TP
OUT-  (via drill 0.3)
  Top 0.15: v35.56,31.49 35.56,31.42 35.63,31.35 35.63,31.21 35.14,30.72 IC2.C3 | v37.29,29.75 36.32,28.78 TP_ON.TP
  Bottom 0.15: v37.29,29.75 v35.56,31.49
P0.00  (via drill 0.35)
  Top 0.15: 29.05,21.72 29.05,21.51 28.98,21.44 28.98,21.31 29.05,21.24 29.05,20.68 28.84,20.48 X2.1 | 29.05,21.72 C17.2 | v30.38,22.95 29.68,22.25 29.58,22.25 29.05,21.72
  Bottom 0.15: U1.P$D2 32.16,20.63 32.58,21.05 30.68,22.95 v30.38,22.95
  other vias: 32.16,20.21
P0.01
  Top 0.15: U1.P$F2 32.1,19.71 31.82,19.99 31.54,19.99 30.02,18.47 30.02,18.4 29.88,18.26 29.12,18.26 28.84,17.98 X2.2 28.77,17.91 28.63,17.77 28.63,16.94 28.77,16.8 29.12,16.8 C18.2
P0.13  (via drill 0.3)
  Top 0.15: U1.P$AD8 33.62,14.94 33.13,14.45 33,14.45 32.93,14.38 32.93,13.9 33.2,13.62 33.34,13.62 33.41,13.69 33.55,13.69 C30.2 33.55,13.62 34.04,13.13 34.04,11.89 33.27,11.13 33.27,9.81 31.68,8.22 31.68,4.76 31.82,4.62 v31.82,4.55 32.03,4.34 32.24,4.34 32.58,3.99 SW_UP.2 | v27.73,5.31 27.18,5.31 R5.1
  Bottom 0.15: v27.73,5.31 31.06,5.31 v31.82,4.55
P0.14  (via drill 0.3)
  Top 0.15: R8.1 20.32,4.83 20.32,4.41 20.39,4.34 21.29,4.34 21.64,3.99 SW_ENT.2 21.36,4.34 22.05,5.03 26.63,5.03 26.83,4.83 27.87,4.83 33,9.95 33,11.96 33.48,12.44 33.48,12.72 33.38,12.82 | v33.41,15.42 33.9,15.42 U1.P$AC9 | 33.38,12.82 33.34,12.79 33.13,12.79 33.07,12.72 33,12.79 C31.2 | 33.38,12.82 v33.55,13
  Bottom 0.15: v33.41,15.42 33.41,13.13 v33.55,13
P1.01  (via drill 0.3)
  Top 0.15: v37.64,15.56 37.64,15.63 37.57,15.7 37.57,16.11 37.64,16.18 U1.P$Y23 | v32.86,7.32 32.65,7.11 32.65,6.62 32.51,6.49 Q1.1 32.51,6.42 32.65,6.28 32.65,5.52 32.79,5.38 33.2,5.38 R_PWR_EPD.1
  Bottom 0.15: v37.64,15.56 37.64,12.58 32.86,7.8 v32.86,7.32
P1.02  (via drill 0.3)
  Top 0.15: 39.57,16.04 38.88,16.04 38.47,16.46 38.19,16.46 U1.P$W24 | 39.57,16.04 39.71,16.18 39.71,16.39 39.64,16.46 39.71,16.53 C29.2 | R7.1 8.55,5.24 8.55,4.96 8.48,4.89 8.48,4.83 8.97,4.34 10.28,4.34 10.63,3.99 SW_DN.2 10.63,3.92 11.39,3.16 v12.77,3.16 | v37.91,11.82 37.91,11.4 v37.36,10.85 | v39.57,15.97 39.57,16.04
  Bottom 0.15: v39.57,15.97 39.57,15.21 37.91,13.55 v37.91,11.82 | v37.36,10.85 37.15,10.85 32.1,5.79 15.41,5.79 v12.77,3.16
PMIC_INT  (via drill 0.35)
  Top 0.15: v31.58,15.75 v30.88,15.05 | v26.38,17.45 26.38,17.95 v26.78,18.35 | v19.38,24.15 18.48,25.05 18.48,25.59 IC1.A1 | U1.P$T2 v32.16,17.01
  Bottom 0.15: v32.16,17.01 32.16,16.33 v31.58,15.75 | v30.88,15.05 29.48,15.05 26.78,17.75 26.68,17.75 v26.38,17.45 | v26.78,18.35 25.18,18.35 v19.38,24.15
PREVGH
  Top 0.15: EPD_C9.2 12.43,15.49 12.43,15.28 12.5,15.21 12.5,15.01 12.43,14.94 12.43,14.52 12.15,14.24 D5.1 12.08,14.17 11.81,13.9 11.6,13.9 11.25,13.55 11.25,13.41 11.11,13.27 10.49,13.27 J1.21
PREVGL
  Top 0.15: EPD_C11.2 15.41,13.97 15.41,13.83 15.13,13.55 14.65,13.55 14.51,13.41 14.09,13.41 13.95,13.55 13.61,13.55 13.12,13.07 13.12,12.51 12.98,12.37 12.71,12.37 12.43,12.1 D2.2 12.36,12.1 12.22,12.23 10.49,12.23 J1.23
RESE
  Top 0.15: R1_EP_DR.2 12.36,20.82 12.22,20.96 Q3.2 12.15,21.58 11.53,21.58 11.32,21.79 11.32,22.07 11.11,22.28 10.49,22.28 J1.3
RESET  (via drill 0.3, 0.35)
  Top 0.15: v44.28,10.64 44.08,10.64 43.66,11.06 43.52,11.06 J2.6 | v36.18,10.5 35.97,10.71 34.8,10.71 TP_RESET.TP 33.78,9.74 v33.78,9.55 | U1.P$AC13 v34.91,15.56
  Bottom 0.15: v44.28,10.64 40.89,10.64 40.2,11.33 40.06,11.33 39.92,11.47 39.51,11.47 39.37,11.33 37.01,11.33 v36.18,10.5 | v33.78,9.55 33.78,10.95 36.28,13.45 36.28,14.65 35.37,15.56 v34.91,15.56
SCK  (via drill 0.3)
  Top 0.15: v34.17,21.93 34.31,21.93 34.66,21.58 34.66,21.51 U1.P$A12 | v29.67,22.97 29.4,22.97 27.31,20.88 27.31,19.98 v23.79,16.46 | v11.18,17.36 11.11,17.29 10.49,17.29 J1.13
  Bottom 0.15: v34.17,21.93 32.79,21.93 31.33,23.38 30.09,23.38 v29.67,22.97 | v23.79,16.46 18.25,16.46 16.16,18.54 10.84,18.54 10.7,18.4 10.7,17.84 v11.18,17.36
SCL  (via drill 0.3, 0.35)
  Top 0.15: 33.71,30.33 32.79,29.41 31.13,29.41 28.01,26.29 | 33.71,30.33 34.04,30.66 IC2.C1 | 28.01,26.29 27.46,26.29 27.32,26.15 27.25,26.15 27.18,26.22 26.83,26.22 U3.7 | R17.2 19.63,19.58 19.63,19.23 19.49,19.09 19.49,17.91 TP_SCL.TP 19.56,18.74 19.77,18.74 19.91,18.88 19.91,18.95 20.05,19.09 v20.05,19.16 | v20.05,20.96 20.25,20.75 20.32,20.75 20.39,20.82 20.6,20.82 R4.1 | IC1.B1 18.32,26.22 18.66,26.22 18.87,26.02 v18.87,25.53 18.87,25.2 19.35,24.72 20.07,24.72 21.09,25.74 22.75,25.74 23.99,24.49 27.66,24.49 28.08,24.91 28.08,25.18 28.01,25.25 28.01,26.29 | v26.63,9.33 27.18,9.33 IC3.12 | v34.68,28.45 33.71,29.42 33.71,30.33 | U1.P$M2 v32.26,18.11
  Bottom 0.15: v18.87,25.53 18.87,22.14 v20.05,20.96 20.05,20.82 20.88,19.99 | v26.63,9.33 26.42,9.33 24.69,11.06 24.55,11.06 24.13,11.47 24.13,16.18 24.27,16.32 24.27,16.6 20.88,19.99 | 20.88,19.99 v20.05,19.16 | v32.26,18.11 32.34,18.11 32.68,18.45 32.68,20.05 32.98,20.35 36.08,20.35 36.88,19.55 36.88,18.65 37.28,18.25 39.38,18.25 40.98,19.85 40.98,23.75 37.48,27.25 35.78,27.25 34.68,28.35 v34.68,28.45
SDA  (via drill 0.3, 0.35)
  Top 0.15: R18.2 19.29,21.03 19.35,20.96 19.29,20.89 19.29,20.61 19.42,20.48 19.56,20.48 19.91,20.13 20.05,20.13 20.12,20.06 20.19,20.06 R2.1 20.25,19.99 20.25,19.85 20.19,19.78 20.19,19.64 20.81,19.02 20.81,18.26 21.5,17.57 21.43,17.5 21.43,17.43 21.85,17.01 21.85,16.6 TP_SDA.TP 21.85,16.53 26.18,12.2 | 26.18,12.2 26.7,11.68 26.7,9.95 IC3.2 | v21.85,27.75 21.75,27.85 20.49,27.85 19.22,26.57 18.32,26.57 IC1.C1 | v26.49,27.26 26.7,27.05 26.7,26.78 26.76,26.71 U3.8 27.48,26.75 v27.58,26.85 | U1.P$L1 31.61,18.47 31.33,18.47 v31.2,18.6 31.2,18.54 30.71,18.05 30.71,16.67 30.09,16.04 30.02,16.04 26.18,12.2 | v30.78,27.25 30.78,28.05 v30.88,28.15 | IC2.B2 v34.47,31.16
  Bottom 0.15: v21.85,27.75 24.48,27.75 24.96,27.26 v26.49,27.26 26.49,25.11 31.2,20.41 v31.2,18.6 | v34.47,31.16 34.47,30.56 34.88,30.15 34.88,29.55 32.58,27.25 v30.78,27.25 | v30.88,28.15 30.68,27.95 29.88,27.95 29.38,27.45 27.98,27.45 27.68,27.15 27.68,26.85 v27.58,26.85
SWDCLK
  Top 0.15: 41.24,14.31 41.65,14.31 42.35,15.01 42.35,15.14 42.55,15.35 42.69,15.35 43.04,15.7 43.59,15.7 TP_SWDCLK.TP | 41.24,14.31 40.75,14.31 40.61,14.45 40.34,14.45 39.16,15.63 38.81,15.63 38.47,15.97 38.19,15.97 U1.P$AA24 | 41.24,14.31 41.24,12.65 41.31,12.58 41.31,12.03 42.21,11.13 J2.4
SWDIO  (via drill 0.3)
  Top 0.15: 38.61,15.14 38.4,15.35 38.26,15.35 38.19,15.42 U1.P$AC24 | 38.61,15.14 38.61,14.24 38.05,13.69 38.05,12.3 39.02,11.33 39.37,11.33 39.51,11.47 39.92,11.47 40.06,11.33 40.13,11.33 40.41,11.61 40.48,11.54 40.55,11.54 40.96,11.13 J2.2 | v40.41,16.94 40.61,16.74 40.61,16.67 41.03,16.25 41.03,15.7 TP_SWDIO.TP | v38.74,15.14 38.61,15.14
  Bottom 0.15: v40.41,16.94 39.92,16.94 38.74,15.77 v38.74,15.14
SWO
  Top 0.15: U1.P$AD22 37.15,14.94 37.15,14.66 36.6,14.1 36.6,12.86 TP_SWO.TP
VBAT  (via drill 0.35)
  Top 0.3: U3.2 v23.98,26.25 23.76,26.47 C27.2 | v23.68,25.55 23.88,25.75 U3.3 | TP_VBAT.TP 16.43,29.2 v16.88,29.65
  Route15 0.3: v23.98,26.25 23.98,25.85 v23.68,25.55 | v16.88,29.65 16.98,29.55 C37.2 17.82,26.55 17.88,26.55 IC1.C2 18.78,27.45 20.68,27.45 21.18,26.95 21.18,25.65 21.48,25.35 21.86,25.35 C27.2
  other vias: 16.98,27.39 17.9,26.57 22.97,26.47
VBUS  (via drill 0.35)
  Top 0.3: v23.08,30.05 22.58,29.55 J4.A9_B4 22.78,28.83 v22.78,27.85 | v26.48,30.25 27.38,29.35 J4.A4_B9 v27.38,27.65 | v21.88,26.25 21.52,26.61 C42.2 21.1,26.75 v20.18,26.75 | IC1.A2 18.08,25.59 v18.08,24.85 | U1.P$AD2 31.85,14.65 v31.68,14.65 31.08,14.05 C21.1 | C38.2 16.93,25.4 v16.48,24.95 | C43.1 12.28,28.41 v12.28,27.95 | v10.68,30.05 9.54,30.05 D3.5
  Route15 0.3: v23.08,30.05 23.28,30.25 v26.48,30.25 | v21.88,26.25 21.88,26.85 22.78,27.75 v22.78,27.85 | v20.18,26.75 19.53,26.1 19.53,25.2 19.18,24.85 v18.08,24.85 17.88,24.65 17.28,24.65 16.98,24.95 v16.48,24.95 15.28,24.95 v12.28,27.95 10.68,29.55 v10.68,30.05 | v31.68,14.65 30.88,14.65 26.78,18.75 26.78,27.05 v27.38,27.65
VREG  (via drill 0.3)
  Top 0.3: 21.36,23.18 21.36,23.04 21.71,22.69 IC9.A1 21.85,22.69 22.12,22.69 | 21.36,23.18 22.12,23.94 22.12,24.35 TP_VREG.TP | 22.12,22.69 IC9.A2 | 22.12,22.69 22.54,22.69 IC9.A3 | 20.98,23.21 21.02,23.25 21.22,23.25 21.36,23.18 | 20.98,23.21 20.6,22.83 C23.2 | IC1.B2 17.83,26.15 17.69,26.15 17.49,25.95 17.49,25.67 17.41,25.67 v17.49,25.53 17.49,24.3 19.01,22.78 C24.2 19.7,22.83 19.7,22.9 19.77,22.97 19.77,23.11 19.7,23.18 19.7,23.25 19.84,23.31 19.91,23.38 20.81,23.38 20.98,23.21 | v16.24,25.74 16.17,25.81 16.17,25.88 16.1,25.95 16.1,26.22 C39.1
  Bottom 0.3: v16.24,25.74 17.28,25.74 v17.49,25.53
(copper drawn outside any net)
  shapes: Bottom area x1, Route15 area x1, Route2 area x1, Top area x2

## Text on the board
tPlace: OP | BAT_GND | VBAT | ON | VREG | SWDIO | SWDCLK | SCL | SDA | SWO | 3.3V | RESET | GND